# EAGLE board simple-hat (EAGLE 6.6.0)
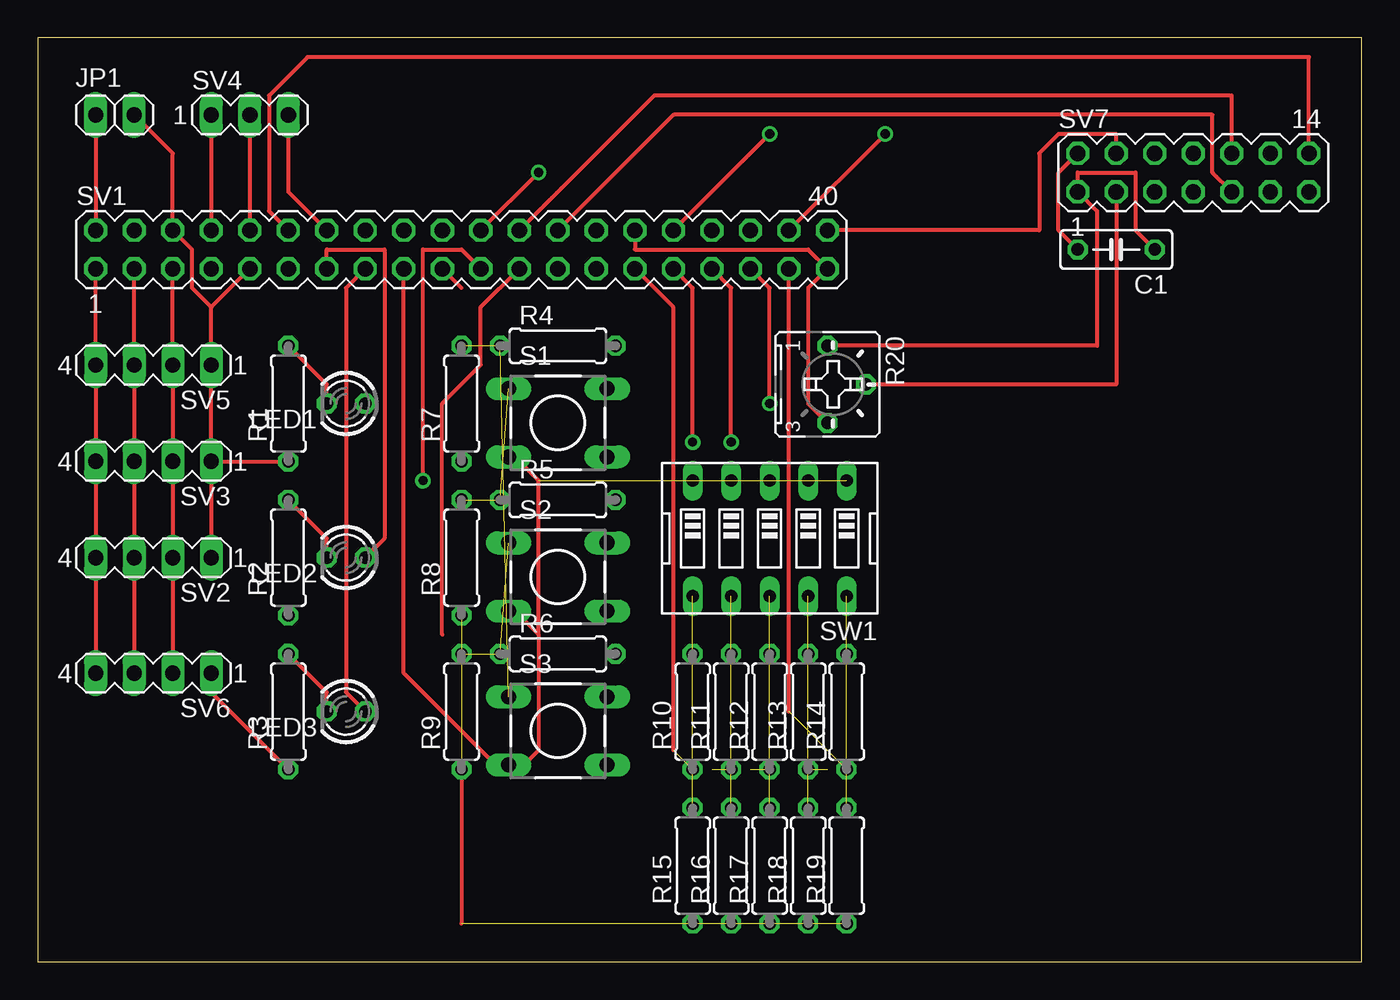
[diagram p0: board, top side]
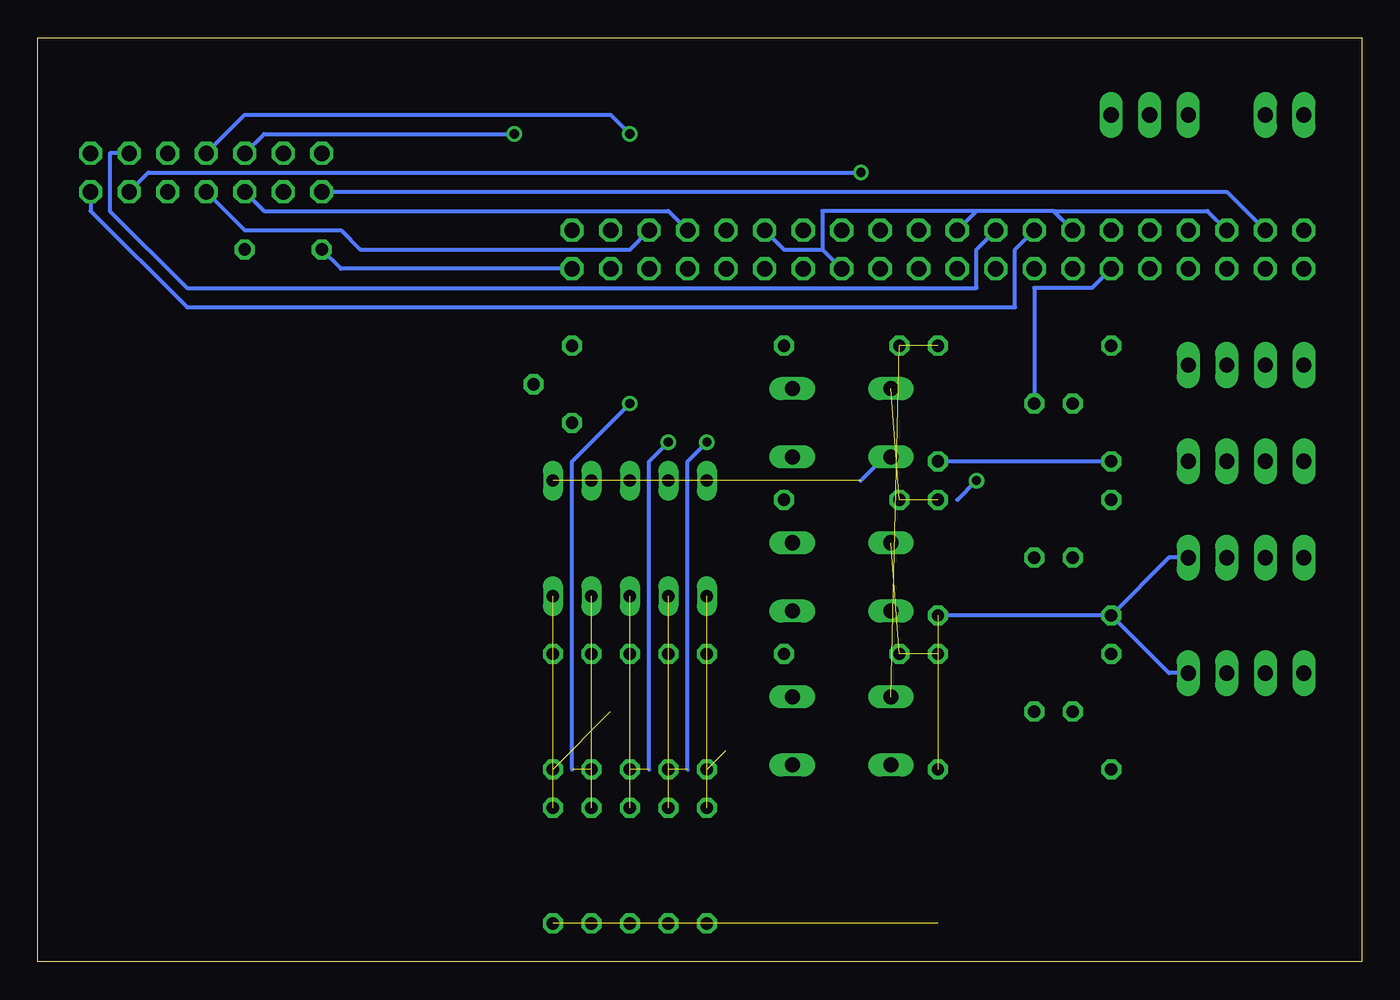
[diagram p1: board, bottom side, seen from below]

Size 87.3 x 60.95 mm. Coordinates in mm from the lower left corner, seen from the top.
Outline: 0,0 87.3,0 87.3,60.95 0,60.95 0,0
Copper layers (1*16): Top 0.035mm / dielectric 1.5mm / Bottom 0.035mm
Design rules "default": minimum track width 10mil, minimum drill 24mil, track to track 8mil, track to pad 8mil, pad to pad 8mil, via to via 8mil, smd to smd 8mil, copper to edge 40mil, drill to drill 8mil, minimum pad ring 10mil, minimum via ring 8mil, stop-mask expansion 4mil, vias tented up to drill 0mil, thermal gap 10mil

## Footprints (pad centres in the part's own frame; a part is rotated, then mirrored left to right if it is on the bottom)
C050-025X075 = drill 0.813 octagon: 1 -2.54,0; 2 2.54,0
1X02 = drill 1.016 long: 1 -1.27,0; 2 1.27,0
LED3MM = drill 0.813 octagon: A -1.27,0; K 1.27,0
0207/7 = drill 0.813 octagon: 1 -3.81,0; 2 3.81,0
B25P = drill 0.813 octagon: A -2.54,0; E 2.54,0; S 0,2.54
DTS-6 = drill 1 long: 1 -3.25,2.25; 2 3.25,2.25; 3 -3.25,-2.25; 4 3.25,-2.25
MA20-2 = drill 1.016 octagon: 1 -24.13,-1.27; 2 -24.13,1.27; 3 -21.59,-1.27; 4 -21.59,1.27; 5 -19.05,-1.27; 6 -19.05,1.27; 7 -16.51,-1.27; 8 -16.51,1.27; 9 -13.97,-1.27; 10 -13.97,1.27; 11 -11.43,-1.27; 12 -11.43,1.27; 13 -8.89,-1.27; 14 -8.89,1.27; 15 -6.35,-1.27; 16 -6.35,1.27; 17 -3.81,-1.27; 18 -3.81,1.27; 19 -1.27,-1.27; 20 -1.27,1.27; 21 1.27,-1.27; 22 1.27,1.27; 23 3.81,-1.27; 24 3.81,1.27; 25 6.35,-1.27; 26 6.35,1.27; 27 8.89,-1.27; 28 8.89,1.27; 29 11.43,-1.27; 30 11.43,1.27; 31 13.97,-1.27; 32 13.97,1.27; 33 16.51,-1.27; 34 16.51,1.27; 35 19.05,-1.27; 36 19.05,1.27; 37 21.59,-1.27; 38 21.59,1.27; 39 24.13,-1.27; 40 24.13,1.27
MA04-1 = drill 1.016 long: 1 -3.81,0; 2 -1.27,0; 3 1.27,0; 4 3.81,0
MA03-1 = drill 1.016 long: 1 -2.54,0; 2 0,0; 3 2.54,0
MA07-2 = drill 1.016 octagon: 1 -7.62,-1.27; 2 -7.62,1.27; 3 -5.08,-1.27; 4 -5.08,1.27; 5 -2.54,-1.27; 6 -2.54,1.27; 7 0,-1.27; 8 0,1.27; 9 2.54,-1.27; 10 2.54,1.27; 11 5.08,-1.27; 12 5.08,1.27; 13 7.62,-1.27; 14 7.62,1.27
EDG-05 = drill 0.813 long: 1 -5.08,-3.81; 2 -2.54,-3.81; 3 0,-3.81; 4 2.54,-3.81; 5 5.08,-3.81; 6 5.08,3.81; 7 2.54,3.81; 8 0,3.81; 9 -2.54,3.81; 10 -5.08,3.81

## Placement (x,y rotation side)
C1  0.1  [C050-025X075]  71.12,46.99 180 top
JP1  FAN  [1X02]  5.08,55.88 0 top
LED1  USER1  [LED3MM]  20.32,36.83 180 top
LED2  USER2  [LED3MM]  20.32,26.67 180 top
LED3  USER3  [LED3MM]  20.32,16.51 180 top
R1  270  [0207/7]  16.51,36.83 90 top
R2  270  [0207/7]  16.51,26.67 90 top
R3  270  [0207/7]  16.51,16.51 90 top
R4  1k  [0207/7]  34.29,40.64 0 top
R5  1k  [0207/7]  34.29,30.48 0 top
R6  1k  [0207/7]  34.29,20.32 0 top
R7  10k  [0207/7]  27.94,36.83 90 top
R8  10k  [0207/7]  27.94,26.67 90 top
R9  10k  [0207/7]  27.94,16.51 90 top
R10  1k  [0207/7]  43.18,16.51 90 top
R11  1k  [0207/7]  45.72,16.51 90 top
R12  1k  [0207/7]  48.26,16.51 90 top
R13  1k  [0207/7]  50.8,16.51 90 top
R14  1k  [0207/7]  53.34,16.51 90 top
R15  10k  [0207/7]  43.18,6.35 90 top
R16  10k  [0207/7]  45.72,6.35 90 top
R17  10k  [0207/7]  48.26,6.35 90 top
R18  10k  [0207/7]  50.8,6.35 90 top
R19  10k  [0207/7]  53.34,6.35 90 top
R20  20k  [B25P]  52.07,38.1 270 top
S1  DTS-6  [DTS-6]  34.29,35.56 0 top
S2  DTS-6  [DTS-6]  34.29,25.4 0 top
S3  DTS-6  [DTS-6]  34.29,15.24 0 top
SV1  GPIO  [MA20-2]  27.94,46.99 0 top
SV2  I2C_1  [MA04-1]  7.62,26.67 180 top
SV3  I2C_2  [MA04-1]  7.62,33.02 180 top
SV4  UART  [MA03-1]  13.97,55.88 0 top
SV5  I2C_3  [MA04-1]  7.62,39.37 180 top
SV6  I2C_4  [MA04-1]  7.62,19.05 180 top
SV7  LCD  [MA07-2]  76.2,52.07 0 top
SW1  USER4  [EDG-05]  48.26,27.94 180 top

## Library data of the parts
C1 R1-R19 = resistor
JP1 = pinhead
LED1-LED3 = led
R20 = pot
S1-S3 = switch-tact
SV1-SV7 = con-lstb; OC_FARNELL: unknown; OC_NEWARK: unknown
SW1 = special

## Nets
+3.3V_01: SV1.1 SV2.4 SV3.4 SV5.4 SV6.4
+3.3V_17: S1.3 S2.3 S3.3 SV1.17 SW1.1 SW1.2 SW1.3 SW1.4 SW1.5
+5V_02: JP1.1 SV1.2
+5V_04: C1.1 R20.A SV1.4 SV7.1
DB0: SV1.36 SV7.7
DB1: SV1.32 SV7.8
DB2: SV1.26 SV7.9
DB3: SV1.24 SV7.10
DB4: SV1.22 SV7.11
DB5: SV1.18 SV7.12
DB6: SV1.16 SV7.13
DB7: SV1.12 SV7.14
E: SV1.38 SV7.6
GND: C1.2 JP1.2 R1.1 R2.1 R3.1 R7.1 R8.1 R9.1 R15.1 R16.1 R17.1 R18.1 R19.1 R20.E SV1.6 SV1.9 SV1.14 SV1.20 SV1.25 SV1.30 SV1.39 SV2.1 SV3.1 SV4.3 SV5.1 SV6.1 SV7.2
GND34: SV1.34 SV7.5
GPIO5: R10.1 SV1.29
GPIO6: R11.1 SV1.31
GPIO9: SV1.21
GPIO10: SV1.19
GPIO11: SV1.23
GPIO13: R12.1 SV1.33
GPIO17: LED1.A SV1.11
GPIO19: R13.1 SV1.35
GPIO22: LED3.A SV1.15
GPIO26: R14.1 SV1.37
GPIO27: LED2.A SV1.13
I2C_SCL: SV1.5 SV2.2 SV3.2 SV5.2 SV6.2
I2C_SDA: SV1.3 SV2.3 SV3.3 SV5.3 SV6.3
N$1: LED1.K R1.2
N$2: LED2.K R2.2
N$3: LED3.K R3.2
N$4: R4.1 R7.2 S3.1
N$5: R5.1 R8.2 S1.1
N$6: R6.1 R9.2 S2.1
N$7: R10.2 R15.2 SW1.6
N$8: R11.2 R16.2 SW1.7
N$9: R12.2 R17.2 SW1.8
N$10: R13.2 R18.2 SW1.9
N$11: R14.2 R19.2 SW1.10
RS: SV1.40 SV7.4
RXD0: SV1.10 SV4.2
TXD0: SV1.8 SV4.1
VO: R20.S SV7.3

## Tracks (layer width: path | path; a pad name or v marks a point on that pad's centre or on a via)
+3.3V_01
  Top 0.254: SV6.4 SV2.4 SV3.4 SV5.4 SV1.1
+3.3V_17  (5 unrouted)
  Top 0.254: 33.02,21.59 33.02,13.97 31.75,12.7 S3.3 30.48,12.7 24.13,19.05 SV1.17 | 33.02,21.59 31.75,22.86 S2.3 | 33.02,21.59 33.02,31.75 31.75,33.02 S1.3
  Bottom 0.254: 33.02,31.75 31.75,33.02 S1.3
+5V_02
  Top 0.254: JP1.1 SV1.2
+5V_04
  Top 0.254: R20.A 69.85,40.64 69.85,49.53 SV7.1 68.58,52.07 72.39,52.07 72.39,48.26 C1.1
  Bottom 0.254: SV1.4 8.89,50.8 SV7.1
DB0
  Bottom 0.254: SV1.36 48.26,46.99 66.04,46.99 67.31,48.26 73.66,48.26 SV7.7
DB1  (via drill 0.61)
  Top 0.254: v48.26,54.61 SV1.32
  Bottom 0.254: v48.26,54.61 49.53,55.88 73.66,55.88 SV7.8
DB2
  Top 0.254: SV1.26 41.91,55.88 77.47,55.88 77.47,52.07 SV7.9
DB3
  Top 0.254: SV1.24 40.64,57.15 78.74,57.15 SV7.10
DB4  (via drill 0.61)
  Top 0.254: v33.02,52.07 SV1.22
  Bottom 0.254: v33.02,52.07 80.01,52.07 SV7.11
DB5
  Bottom 0.254: SV1.18 25.4,46.99 25.4,44.45 77.47,44.45 82.55,49.53 82.55,53.34 SV7.12
DB6
  Bottom 0.254: SV1.16 22.86,46.99 22.86,43.18 77.47,43.18 83.82,49.53 SV7.13
DB7
  Top 0.254: SV1.12 15.24,49.53 15.24,57.15 17.78,59.69 83.82,59.69 SV7.14
E  (via drill 0.61)
  Top 0.254: v55.88,54.61 SV1.38
  Bottom 0.254: v55.88,54.61 72.39,54.61 SV7.6
GND  (6 unrouted)
  Top 0.254: R20.E 50.8,36.83 50.8,44.45 SV1.39 50.8,46.99 39.37,46.99 SV1.30 | SV7.2 67.31,52.07 67.31,48.26 C1.2 | JP1.2 8.89,53.34 SV1.6 10.16,46.99 10.16,44.45 11.43,43.18 | SV1.14 16.51,50.8 SV4.3 | SV3.1 R1.1 | SV3.1 SV5.1 11.43,43.18 | 11.43,43.18 SV1.9 | SV3.1 SV2.1 | R3.1 11.43,17.78 SV6.1 | R9.1 27.94,2.54
  Bottom 0.254: C1.2 67.31,45.72 SV1.39 | 35.56,46.99 SV1.25 | 35.56,46.99 38.1,46.99 SV1.30 | 25.4,49.53 SV1.20 | 20.32,49.53 25.4,49.53 | SV1.14 20.32,49.53 | 35.56,46.99 35.56,49.53 25.4,49.53 | SV1.6 10.16,49.53 20.32,49.53 | R2.1 12.7,26.67 SV2.1 | R2.1 R8.1 | R1.1 R7.1 | R2.1 12.7,19.05 SV6.1
GND34
  Bottom 0.254: SV1.34 45.72,49.53 72.39,49.53 SV7.5
GPIO5  (1 unrouted)
  Top 0.254: SV1.29 41.91,43.18 41.91,13.97
GPIO6  (via drill 0.61)  (1 unrouted)
  Top 0.254: SV1.31 43.18,44.45 v43.18,34.29
  Bottom 0.254: v43.18,34.29 44.45,33.02 44.45,12.7
GPIO9  (via drill 0.61)
  Top 0.254: SV1.21 27.94,46.99 25.4,46.99 v25.4,31.75
  Bottom 0.254: 26.67,30.48 v25.4,31.75
GPIO10
  Top 0.254: 27.94,44.45 SV1.19
GPIO11
  Top 0.254: SV1.23 29.21,43.18 29.21,39.37 26.67,36.83 26.67,21.59
GPIO13  (via drill 0.61)  (1 unrouted)
  Top 0.254: SV1.33 45.72,44.45 v45.72,34.29
  Bottom 0.254: v45.72,34.29 46.99,33.02 46.99,12.7
GPIO17
  Bottom 0.254: LED1.A 21.59,44.45 17.78,44.45 SV1.11
GPIO19  (via drill 0.61)  (1 unrouted)
  Top 0.254: SV1.35 48.26,44.45 v48.26,36.83
  Bottom 0.254: v48.26,36.83 52.07,33.02 52.07,12.7
GPIO22
  Top 0.254: LED3.A 20.32,17.78 20.32,44.45 SV1.15
GPIO26  (1 unrouted)
  Top 0.254: 49.53,16.51 SV1.37
GPIO27
  Top 0.254: LED2.A 22.86,27.94 22.86,46.99 19.05,46.99 SV1.13
I2C_SCL
  Top 0.254: SV6.2 SV2.2 SV3.2 SV5.2 SV1.5
I2C_SDA
  Top 0.254: SV6.3 SV2.3 SV3.3 SV5.3 SV1.3
N$1
  Top 0.254: R1.2 19.05,38.1 LED1.K
N$2
  Top 0.254: R2.2 19.05,27.94 LED2.K
N$3
  Top 0.254: R3.2 19.05,17.78 LED3.K
N$4  (2 unrouted)
N$5  (2 unrouted)
N$6  (2 unrouted)
N$7  (2 unrouted)
N$8  (2 unrouted)
N$9  (2 unrouted)
N$10  (2 unrouted)
N$11  (2 unrouted)
RS
  Top 0.254: SV1.40 66.04,48.26 66.04,53.34 67.31,54.61 71.12,54.61 SV7.4
RXD0
  Top 0.254: SV4.2 SV1.10
TXD0
  Top 0.254: SV4.1 SV1.8
VO
  Top 0.254: R20.S 71.12,38.1 SV7.3